# EAGLE board Ingenious Rottis-Jaban (EAGLE 9.7.0)

Size 143.12 x 82.4 mm. Coordinates in mm from the lower left corner, seen from the top.
Outline: 0,0 143.12,0 143.12,82.4 0,82.4 0,0
Copper layers (1*16): Top 0.035mm / dielectric 1.5mm / Bottom 0.035mm
Design rules "default": minimum track width 6mil, minimum drill 0.35mm, track to track 6mil, track to pad 6mil, pad to pad 6mil, via to via 6mil, smd to smd 6mil, copper to edge 40mil, drill to drill 6mil, minimum pad ring 10mil, minimum via ring 8mil, stop-mask expansion 4mil, vias tented up to drill 0mil, thermal gap 10mil

## Footprints (pad centres in the part's own frame; a part is rotated, then mirrored left to right if it is on the bottom)
LEDRD254W60D565H860B_G = drill 0.981 pad 1.581: 1 -1.27,0; 2 1.27,0
LEDRD254W60D565H860B = drill 0.981 pad 1.581: 1 -1.27,0; 2 1.27,0
LEDRD254W60D565H860B_B = drill 0.981 pad 1.581: 1 -1.27,0; 2 1.27,0
RESAD1016W63L850D250B = drill 0.83 pad 1.43: 1 -5.08,0; 2 5.08,0
78B04ST = drill 0.8: 1 -3.81,-3.81; 2 -1.27,-3.81; 3 1.27,-3.81; 4 3.81,-3.81; 5 3.81,3.81; 6 1.27,3.81; 7 -1.27,3.81; 8 -3.81,3.81
ARDUINO-UNO-R3-SHIELD = drill 1.016 pad 1.88: 3.3V 24.13,-2.54; 5V 24.13,0; A0 24.13,12.7; A1 24.13,15.24; A2 24.13,17.78; A3 24.13,20.32; A4 24.13,22.86; A5 24.13,25.4; AREF -24.13,-13.97; D2 -24.13,20.32; D3 -24.13,17.78; D4 -24.13,15.24; D5 -24.13,12.7; D6 -24.13,10.16; D7 -24.13,7.62; D8 -24.13,3.81; D9 -24.13,1.27; D10 -24.13,-1.27; D11 -24.13,-3.81; D12 -24.13,-6.35; D13 -24.13,-8.89; GND@0 24.13,2.54; GND@1 24.13,5.08; GND@2 -24.13,-11.43; IOREF 24.13,-7.62; NC 24.13,-10.16; RES 24.13,-5.08; RX -24.13,25.4; SCL -24.13,-19.05; SDA -24.13,-16.51; TX -24.13,22.86; VIN 24.13,7.62

## Placement (x,y rotation side)
DA_MAYOR  GREEN  [LEDRD254W60D565H860B_G]  74.56,57.61 180 top
DA_MENOR  RED  [LEDRD254W60D565H860B]  135.52,57.61 180 top
DIGUAL  BLUE  [LEDRD254W60D565H860B_B]  102.5,57.61 180 top
R1  330  [RESAD1016W63L850D250B]  75.83,47.45 90 top
R2  330  [RESAD1016W63L850D250B]  103.77,47.45 90 top
R3  330  [RESAD1016W63L850D250B]  136.79,47.45 90 top
SW1  SPST-478B04ST  [78B04ST]  89.8,66.5 0 top
SW2  SPST-478B04ST  [78B04ST]  117.74,66.5 0 top
U1  ARDUINO-UNO-R3-SHIELD  [ARDUINO-UNO-R3-SHIELD]  29.84,34.52 180 top

## Library data of the parts
DA_MAYOR = Tinkercad; CATEGORY: Opto-Electronic; SUB-CATEGORY: LED; VALUE: LED_GREEN
DA_MENOR = Tinkercad; CATEGORY: Opto-Electronic; SUB-CATEGORY: LED; VALUE: LED_RED
DIGUAL = Tinkercad; CATEGORY: Opto-Electronic; SUB-CATEGORY: LED; VALUE: LED_BLUE
R1-R3 SW1 SW2 U1 = Tinkercad

## Nets
DA_MAYOR_A: DA_MAYOR.1 R1.2
DA_MENOR_A: DA_MENOR.1 R3.2
DIGUAL_A: DIGUAL.1 R2.2
U1_5V: R1.1 R2.1 R3.1 U1.5V
U1_D2: SW1.8 U1.D2
U1_D3: SW1.7 U1.D3
U1_D4: SW1.6 U1.D4
U1_D5: SW1.5 U1.D5
U1_D6: SW2.8 U1.D6
U1_D7: SW2.7 U1.D7
U1_D8: SW2.6 U1.D8
U1_D9: SW2.5 U1.D9
U1_D10: DA_MAYOR.2 U1.D10
U1_D11: DIGUAL.2 U1.D11
U1_D12: DA_MENOR.2 U1.D12
U1_GND: SW1.1 SW1.2 SW1.3 SW1.4 SW2.1 SW2.2 SW2.3 SW2.4 U1.GND@0 U1.GND@1 U1.GND@2

## Tracks (layer width: path | path; a pad name or v marks a point on that pad's centre or on a via)
DA_MAYOR_A  (1 unrouted)
DA_MENOR_A  (1 unrouted)
DIGUAL_A  (1 unrouted)
U1_5V  (3 unrouted)
U1_D2  (1 unrouted)
U1_D3  (1 unrouted)
U1_D4  (1 unrouted)
U1_D5  (1 unrouted)
U1_D6  (1 unrouted)
U1_D7  (1 unrouted)
U1_D8  (1 unrouted)
U1_D9  (1 unrouted)
U1_D10  (1 unrouted)
U1_D11  (1 unrouted)
U1_D12  (1 unrouted)
U1_GND  (10 unrouted)